# EAGLE board TRADFRIICC-1dimmer (EAGLE 9.6.2)
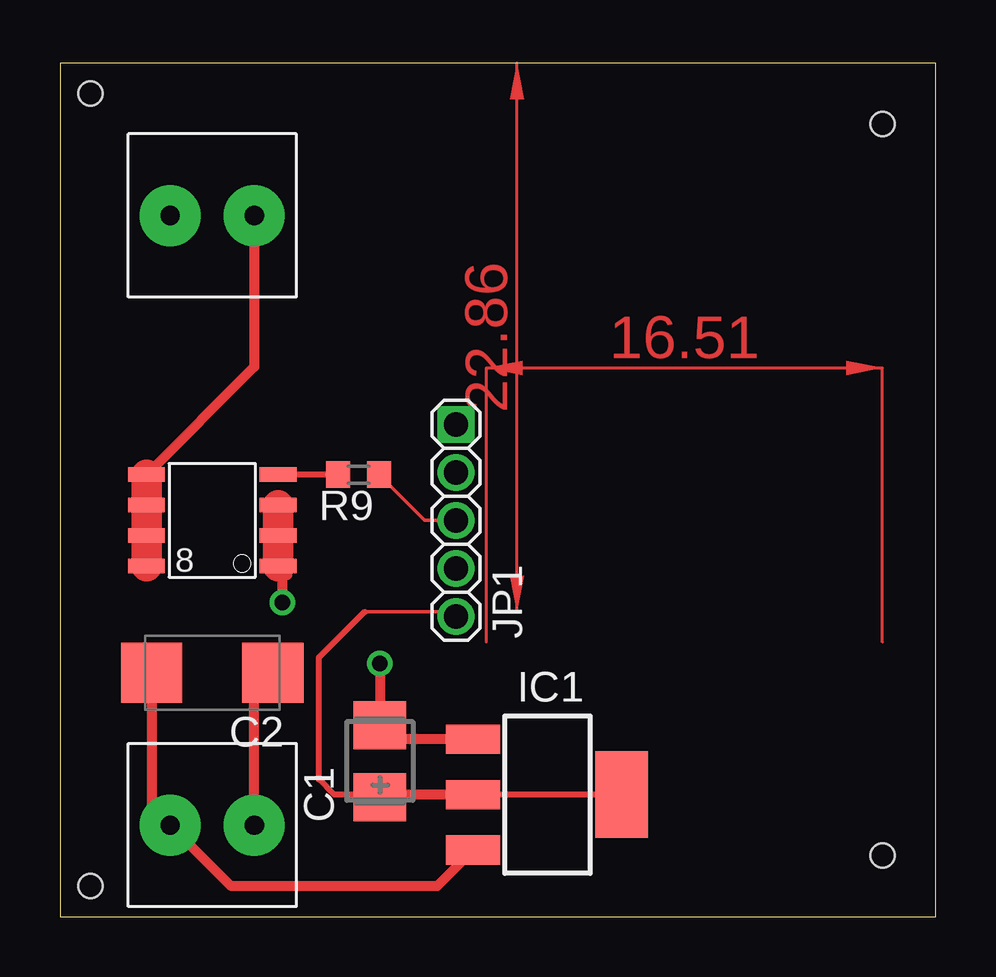
[diagram p0: board, top side]
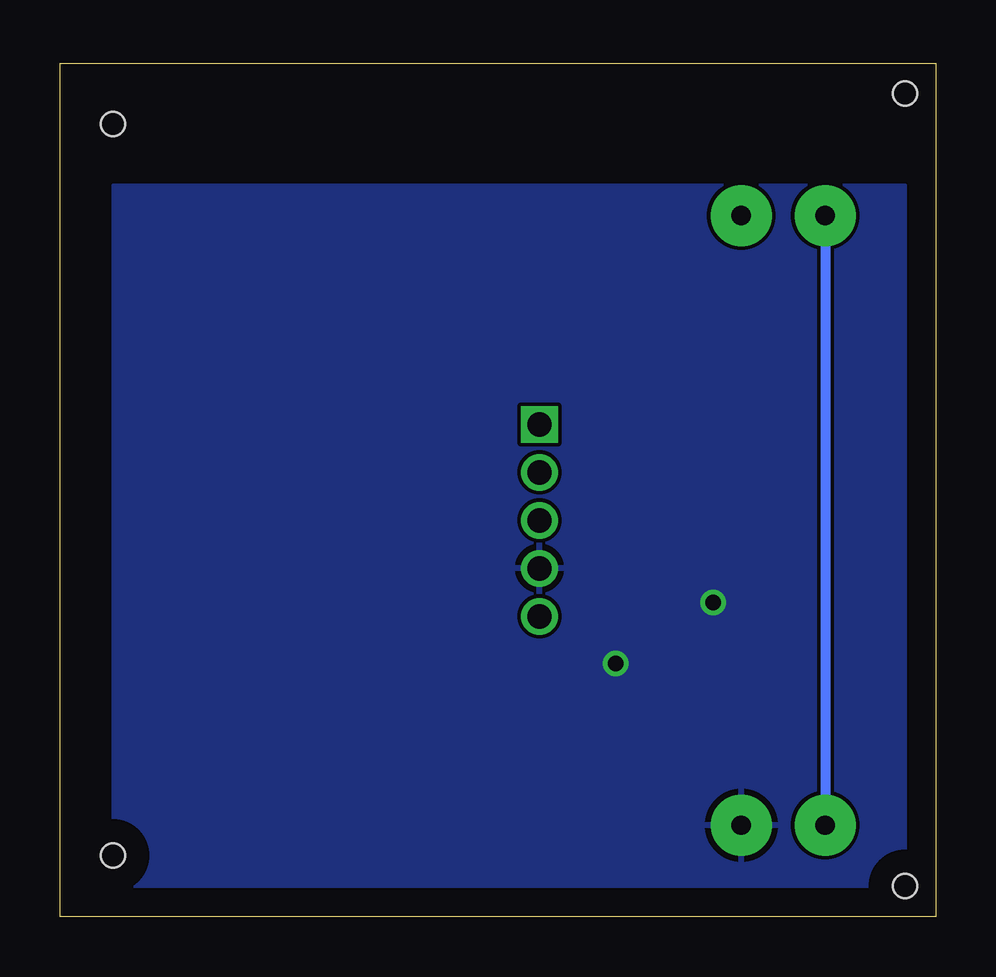
[diagram p1: board, bottom side, seen from below]

Size 36.5 x 35.55 mm. Coordinates in mm from the lower left corner, seen from the top.
Outline: 0,0 36.5,0 36.5,35.55 0,35.55 0,0
Copper layers (1*16): Top 0.035mm / dielectric 1.5mm / Bottom 0.035mm
Design rules "default": minimum track width 6mil, minimum drill 0.35mm, track to track 6mil, track to pad 6mil, pad to pad 6mil, via to via 6mil, smd to smd 6mil, copper to edge 40mil, drill to drill 6mil, minimum pad ring 10mil, minimum via ring 8mil, stop-mask expansion 4mil, vias tented up to drill 0mil, thermal gap 10mil
Holes 1 mm at 1.27,34.29 1.27,1.27 34.29,2.54 34.29,33.02

## Footprints (pad centres in the part's own frame; a part is rotated, then mirrored left to right if it is on the bottom)
CT3528 = smd 2 x 2.2: + -1.5,0; - 1.5,0
C/6032-28R = smd 2.55 x 2.5: + 2.525,0; - -2.525,0
SOT223 = smd 1.219 x 2.235: 1 -2.311,-3.099; 2 0,-3.099; 3 2.311,-3.099 | smd 3.6 x 2.2: TAB 0,3.099
1_05X2MM = drill 1.016 pad 1.3 square: 1 -4,0 | drill 1.016 pad 1.3: 2 -2,0; 3 0,0; 4 2,0; 5 4,0
KF350-2P = drill 0.8 pad 2.54: 1 -1.75,0; 2 1.75,0
R0603 = smd 1 x 1.1: 1 -0.85,0; 2 0.85,0
SO-8 = smd 1.524 x 0.61: 1 -2.743,1.905; 2 -2.743,0.635; 3 -2.743,-0.635; 4 -2.743,-1.905; 5 2.743,-1.905; 6 2.743,-0.635; 7 2.743,0.635; 8 2.743,1.905

## Placement (x,y rotation side)
C1  100u  [CT3528]  13.33,6.48 90 top
C2  10u  [C/6032-28R]  6.35,10.16 180 top
IC1  LM1117MPX-3.3  [SOT223]  20.32,5.08 270 top
JP1  [1_05X2MM]  16.51,16.51 270 top
PWR_IN  KF350-P2  [KF350-2P]  6.35,3.81 180 top
PWR_IN1  KF350-P2  [KF350-2P]  6.35,29.21 180 top
R9  10K  [R0603]  12.45,18.41 180 top
W  [SO-8]  6.35,16.51 180 top

## Library data of the parts
C1 C2 = rcl; SPICEPREFIX: C
IC1 = lm1117
JP1 = pinhead
PWR_IN PWR_IN1 = KF350-P2
R9 = resistor
W = transistor-fet

## Nets
+3V3: C1.+ IC1.2 IC1.TAB JP1.5
DW: PWR_IN1.1 W.5 W.6 W.7 W.8
GND: C1.- C2.- IC1.1 JP1.4 PWR_IN.1 W.1 W.2 W.3
N$4: JP1.2
N$5: JP1.1
N$13: R9.2 W.4
PWM: JP1.3 R9.1
VDD: C2.+ IC1.3 PWR_IN1.2 PWR_IN.2

## Tracks (layer width: path | path; a pad name or v marks a point on that pad's centre or on a via)
+3V3
  Top 0.152: 12.7,12.7 16.32,12.7 JP1.5
  Top 0.254: IC1.TAB IC1.2 | 13.44,5.08 C1.+ 13.23,5.08 11.43,5.08 10.79,5.71 10.79,10.79 12.7,12.7
  Top 0.406: IC1.2 13.44,5.08
DW
  Top 0.406: PWR_IN1.1 8.1,22.91 W.5
  Top 1.27: W.8 W.7 W.6 W.5
GND  (via drill 0.65)
  Top 0.254: 13.74,8.38 C1.-
  Top 0.406: 9.47,10.76 C2.- 8.1,9.37 PWR_IN.1 | 9.47,14.22 W.1 9.27,14.43 v9.27,13.08 | 13.86,7.74 13.09,7.74 C1.- | IC1.1 13.92,7.39 C1.- | v13.33,10.54 C1.-
  Top 1.27: W.1 W.3 W.2
  pour Bottom: 1.27,30.48 34.29,30.48 34.29,1.27 1.27,1.27
N$13
  Top 0.254: R9.2 W.4
PWM
  Top 0.152: R9.1 15.2,16.51 JP1.3
VDD
  Top 0.406: C2.+ 3.83,4.58 PWR_IN.2 7.14,1.27 15.72,1.27 IC1.3
  Bottom 0.406: PWR_IN1.2 PWR_IN.2
(copper drawn outside any net)
  shapes: Top area x2